# Altium PCB BenchTop_Pcb.PcbDoc
Units mil, origin at the board's own origin, x right, y up, seen from the top; angles counter-clockwise.
Board outline 6000 x 4000 mil, 2 copper layers (Top Layer, Bottom Layer); 37 components, 26 nets, 106 pads, 0 vias.
Unrouted connection lines stored in the file: 69.
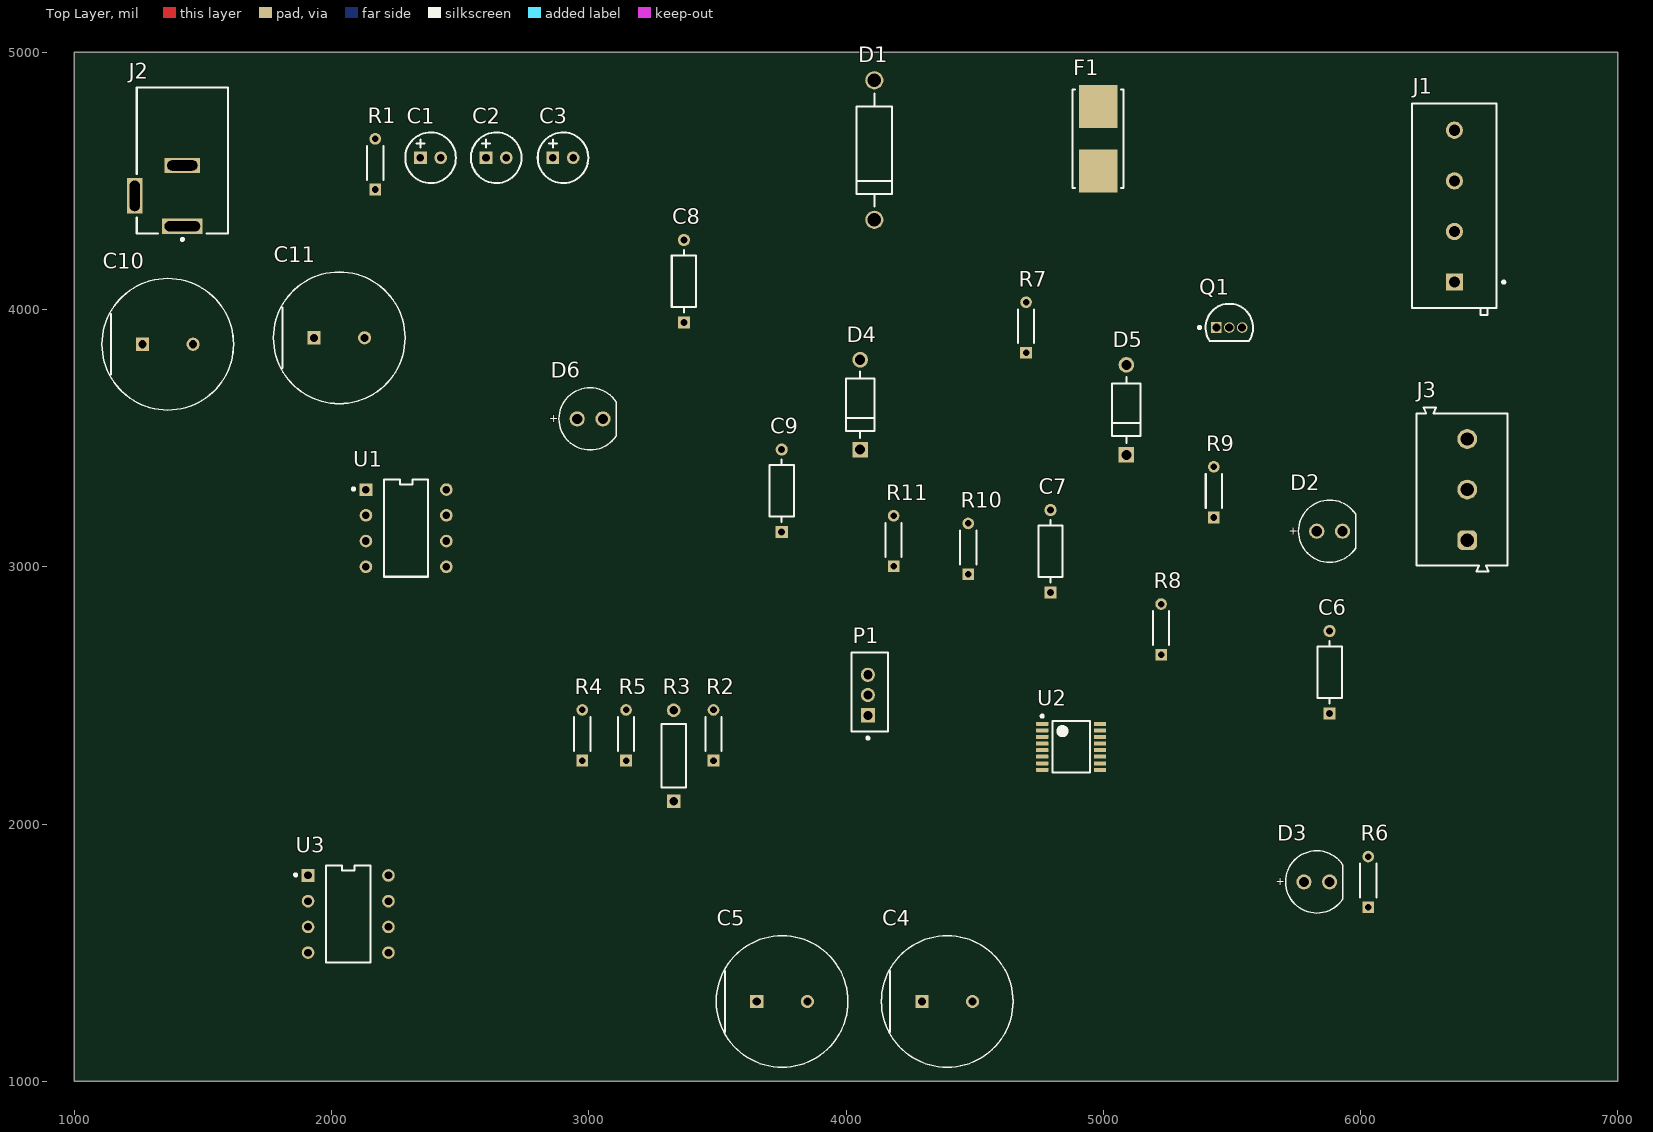
[diagram p0: Top Layer view]
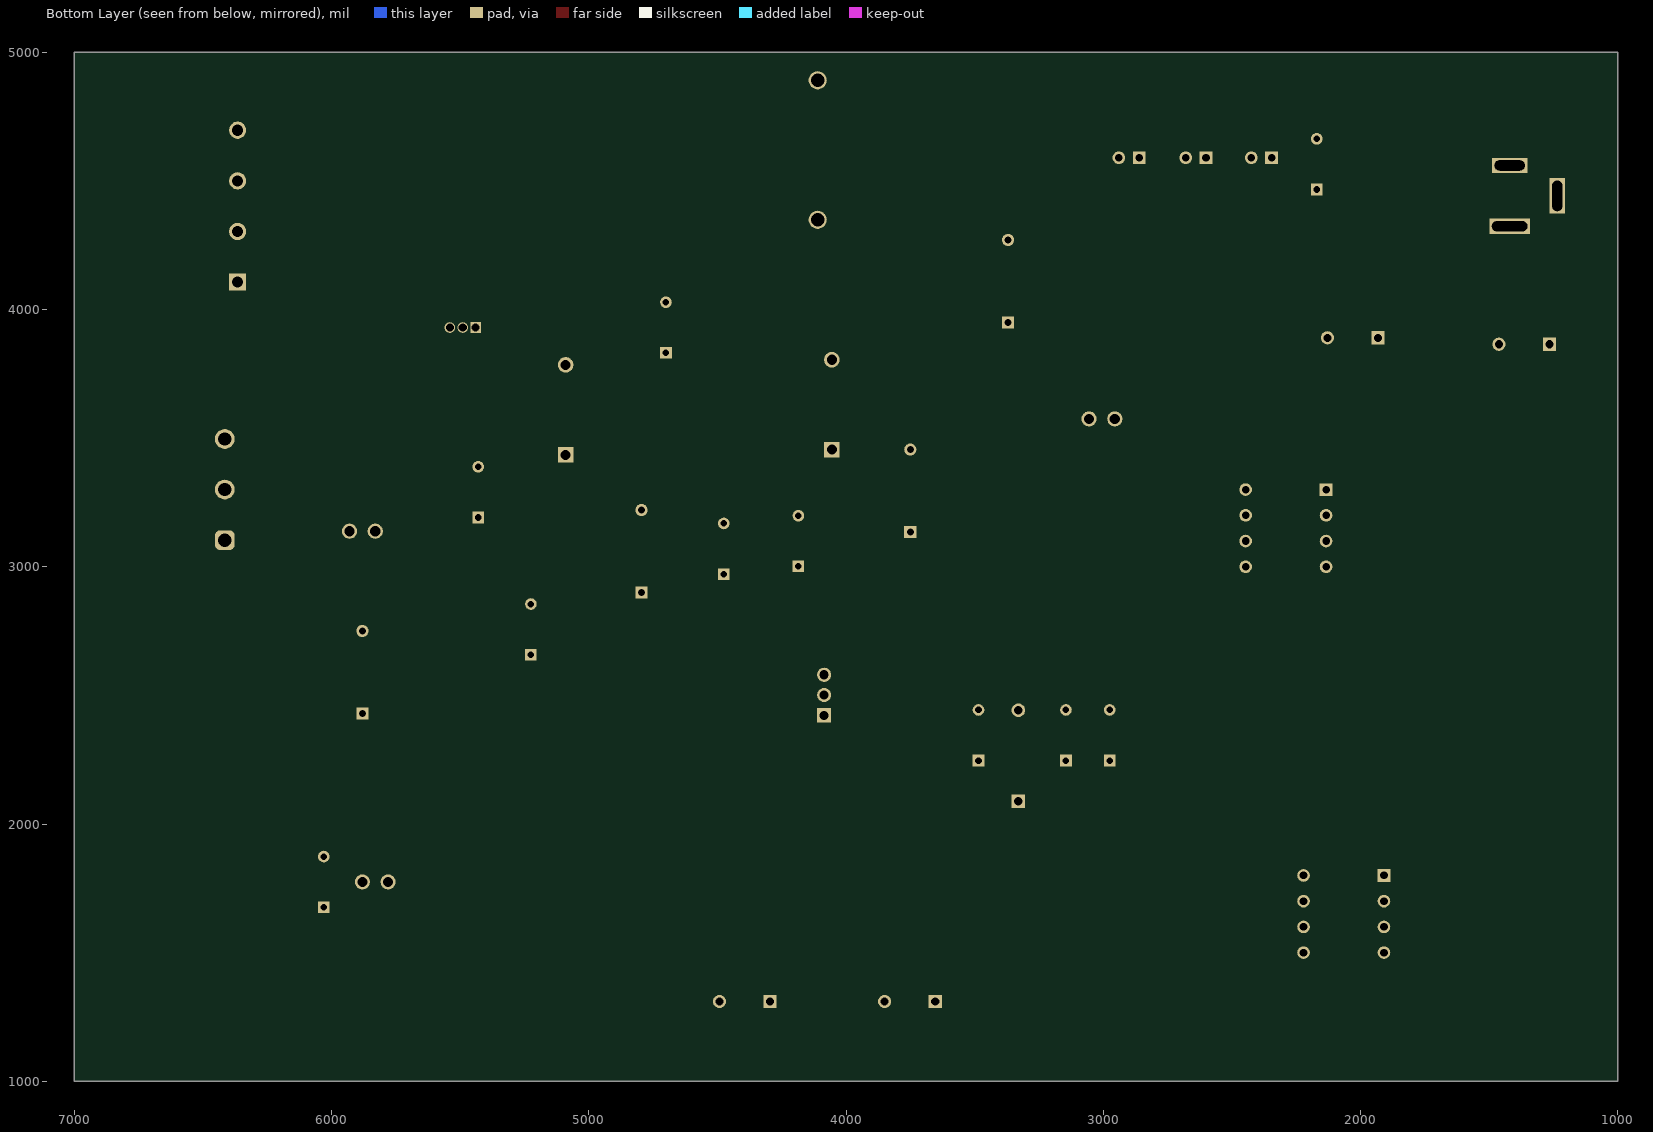
[diagram p1: Bottom Layer view, seen from below]

## Layer stack, top to bottom
Top Solder: solder mask 0.4, Solder Resist, Dk 3.5
Top Layer: signal copper 1.4
Dielectric 1: dielectric 12.6, FR-4, Dk 4.8
Bottom Layer: signal copper 1.4
Bottom Solder: solder mask 0.4, Solder Resist, Dk 3.5

## Board outline
1000,1000 7000,1000 7000,5000 1000,5000

## Design rules (kind name [scope] priority, off if disabled: settings)
Clearance [All] p1: gap=10 ignorepadtopadclearanceinfootprint=FALSE
PolygonConnect [All] p1: connectstyle=Relief reliefconductorwidth=10 reliefentries=4 polygonreliefangle="90 Angle" airgapwidth=10
RoutingVias [All] p1: holewidth=28 width=50 viastyle="Through Hole" minholewidth=28 minwidth=50 maxholewidth=28 maxwidth=50
SolderMaskExpansion [All] p1: expansion=4 istentingtop=FALSE
SupplyNets "Schematic Supply Nets_1" [InNet('GND')] p1: voltage=0.000
SupplyNets "Schematic Supply Nets" [InNet('+12')] p2: voltage=0.000
Width [All] p1: maxlimit=10 minlimit=10 preferedwidth=10
30 further rules are at their usual default settings.

## Components (designator, comment, footprint, x,y, rotation, side; value= is the part's Value field where it differs from the comment)
C1 "47 uF" NIC-UVR-5x11-2_V 2385,4590 r0 top
C2 "47 uF" NIC-UVR-5x11-2_V 2640,4590 r0 top
C3 "47 uF" NIC-UVR-5x11-2_V 2900,4590 r0 top
C4 "10uF" FP-RAD-TH-D_12_5_0_5-L_20-MFG 4393.43,1310 r0 top
C5 "10uF" FP-RAD-TH-D_12_5_0_5-L_20-MFG 3751.57,1310 r0 top
C6 "0.01uF" FP-C410C104M5U5TA7200-MFG 5880,2590 r90 top
C7 "0.22uF" FP-C410C104M5U5TA7200-MFG 4795,3060 r90 top
C8 "0.01uF" FP-C410C104M5U5TA7200-MFG 3370,4110 r90 top
C9 "0.01uF" FP-C410C104M5U5TA7200-MFG 3750,3295 r90 top
C10 "1F" FP-RAD-TH-D_12_5_0_5-L_20-MFG 1363.43,3865 r0 top
C11 "1F" FP-RAD-TH-D_12_5_0_5-L_20-MFG 2030,3890 r0 top
D1 "P6KE36ARLG" ONSC-SURMETIC40-2-017AA-01 4110,4620 r90 top
D2 "151051VS04000" WL-TMRC_D5.9H8.7 5880,3138.27 r0 top value=150nF
D3 "151051RS11000" WL-TMRC_D5.9H8.7 5830,1775 r0 top
D4 "1N4007" FP-1N4007-MFG 4055,3630 r90 top value=15pF
D5 "1N4007" FP-1N4007-MFG 5090,3610 r90 top value=15pF
D6 "151051BS04000" WL-TMRC_D5.9H8.7 3005,3575 r0 top
F1 "0154004.DR" FP-0154-MFG 4980,4664.61 r90 top
J1 "282836-4" FP-282836-4-MFG 6365,4390 r90 top
J2 "PJ-002A" CUI-PJ-002A_V 1420,4441.89 r90 top
J3 "Pot" 691101710003 6395.31,3300.01 r90 top
P1 "292161-3" TECO-292161-3_V 4085,2501.26 r90 top
Q1 "BC547B" ONSC-TO-92-3-29-11 5490,3930 r0 top
R1 "1K" FP-MRS1600-MFG 2170,4565 r90 top
R2 "270ohms" FP-MRS1600-MFG 3485,2345 r90 top
R3 "MFR-25FBF52-1K" RESA60-630X240 3330,2265 r90 top
R4 "12K" FP-MRS1600-MFG 2975,2345 r90 top
R5 "5K" FP-MRS1600-MFG 3145,2345 r90 top
R6 "1K" FP-MRS1600-MFG 6030,1775 r90 top
R7 "1k" FP-MRS1600-MFG 4700,3930 r90 top
R8 "1K" FP-MRS1600-MFG 5225,2756.57 r90 top
R9 "270ohms" FP-MRS1600-MFG 5430,3290 r90 top
R10 "830k" FP-MRS1600-MFG 4475,3070 r90 top
R11 "10K" FP-MRS1600-MFG 4185,3100 r90 top
U1 "LM555CN/NOPB" FP-P0008A-MFG 2290,3150 r0 top
U2 "CD4060BPW" PW0016A_L 4875,2300 r0 top
U3 "LM555CN/NOPB" FP-P0008A-MFG 2065,1650 r0 top

## Footprints (in the part's own frame and the unit in brackets; to place one, negate y for a bottom-side part, rotate by r counter-clockwise, add the part's x,y. Pads: shape width x height; smd on the part's side, far side on the other; paste and mask are expansions set on the pad)
691101710003 [mm] "5,00mm - modular - blue - Horizontal entry with pressure clamp - 12,6mm height - 03p"
  rrect50% 1.95x1.95 hole 1.3: 1(-5,-0.5)
  round 1.95 hole 1.3: 2(0,-0.5) 3(5,-0.5)
  silkscreen extent -8.1,-4.5 8.1,4.5, body extent -8.1,-4.5 8.1,4.5, height 12.65
CUI-PJ-002A_V [mm] "THD, 3-Leads, Body 14.4x9mm, Height 11mm"
  rect 1.5x4 hole 1 slot 3.5 at 90 deg: 1(-3,0)
  rect 1.5x3.5 hole 1 slot 3 at 90 deg: 2(3,0)
  rect 3.5x1.5 hole 1 slot 3 at 0 deg: 3(0,4.7)
  silkscreen extent -4.42,-4.5 10.7,4.5, body extent -3.7,-4.5 10.7,4.9, height 11
FP-1N4007-MFG [mm]
  rect 1.55x1.55 hole 1 paste-2539.97 mask+0: 1(-4.44,0)
  round 1.55 hole 1 paste-2539.97 mask+0: 2(4.44,0)
  silkscreen extent -3.26,-1.4 3.26,1.4, body extent -5.32,-1.5 5.32,1.5, height 0.25
FP-0154-MFG [mm]
  rect 4.24x3.81 smd paste+0 mask+0: 1(-3.185,0) 2(3.185,0)
  silkscreen extent -4.86,-2.51 4.86,2.51, body extent -5.41,-2.62 5.41,2.62, height 0.25
FP-282836-4-MFG [mm]
  rect 1.7x1.7 hole 1.1 paste-2539.97 mask+0: 1(-7.2,0)
  round 1.7 hole 1.1 paste-2539.97 mask+0: 2(-2.2,0) 3(2.8,0) 4(7.8,0)
  silkscreen extent -10.43,-5 10.43,4.18, body extent -10.52,-4.28 10.53,4.28, height 0.25
FP-C410C104M5U5TA7200-MFG [mm]
  rect 1.2x1.2 hole 0.7 paste-2539.97 mask+0: 1(-4.075,0)
  round 1.2 hole 0.7 paste-2539.97 mask+0: 2(4.075,0)
  silkscreen extent -3.08,-1.2 3.08,1.2, body extent -4.77,-1.31 4.77,1.31, height 0.25
FP-MRS1600-MFG [mm]
  rect 1.15x1.15 hole 0.65 paste-2539.97 mask+0: 1(-2.5,0)
  round 1.15 hole 0.65 paste-2539.97 mask+0: 2(2.5,0)
  silkscreen extent -1.55,-0.8 1.8,0.8, body extent -3.17,-0.9 3.17,0.9, height 0.25
FP-P0008A-MFG [mm]
  rect 1.25x1.25 hole 0.75 paste-2539.97 mask+0: 1(-3.97,3.81)
  round 1.25 hole 0.75 paste-2539.97 mask+0: 2(-3.97,1.27) 3(-3.97,-1.27) 4(-3.97,-3.81) 5(3.97,-3.81) 6(3.97,-1.27) 7(3.97,1.27) 8(3.97,3.81)
  silkscreen extent -5.32,-4.79 2.17,4.79, body extent -4.69,-5.18 4.69,5.18, height 0.25
FP-RAD-TH-D_12_5_0_5-L_20-MFG [mm]
  rect 1.3x1.3 hole 0.8 paste-2539.97 mask+0: 1(-2.5,0)
  round 1.3 hole 0.8 paste-2539.97 mask+0: 2(2.5,0)
  silkscreen extent -6.5,-6.5 6.5,6.5, body extent -6.6,-6.6 6.6,6.6, height 0.25
NIC-UVR-5x11-2_V [mm] "THD, 2-Leads, Dia 5mm, Body Length 11mm, Pin Spacing 2mm"
  rect 1.25x1.25 hole 0.75: 1(-1,0)
  round 1.25 hole 0.75: 2(1,0)
  silkscreen extent -2.5,-2.5 2.5,2.5, body extent -2.5,-2.5 2.5,2.5, height 12.5
ONSC-SURMETIC40-2-017AA-01 [mm] "AXIAL, 2-Leads, Diameter 3.49mm"
  round 1.8 hole 1.3: 1(-6.887,0) 2(6.887,0)
  silkscreen extent -5.59,-1.75 5.59,1.75
ONSC-TO-92-3-29-11 [mm] "TO, 3-Leads, Body Dia 4.7mm, Pitch 1.27mm"
  rect 1.05x1.05 hole 0.8: 1(-1.27,0)
  round 1.05 hole 0.8: 2(0,0) 3(1.27,0)
  silkscreen extent -3.07,-1.34 2.35,2.35, body extent -2.35,-1.33 2.36,2.36, height 7.87
PW0016A_L [mm] "SOP, 16-Leads, Body 5.1x4.5mm, Pitch 0.65mm, IPC High Density"
  rrect25% 1.2x0.4 smd: 1(-2.85,2.275) 2(-2.85,1.625) 3(-2.85,0.975) 4(-2.85,0.325) 5(-2.85,-0.325) 6(-2.85,-0.975) 7(-2.85,-1.625) 8(-2.85,-2.275) 9(2.85,-2.275) 10(2.85,-1.625) 11(2.85,-0.975) 12(2.85,-0.325) 13(2.85,0.325) 14(2.85,0.975) 15(2.85,1.625) 16(2.85,2.275)
  silkscreen extent -2.97,-2.55 1.85,3.15, body extent -3.21,-2.5 3.21,2.5, height 1
RESA60-630X240 [mm] "Axial Resistor, 2-Leads, Dia 2.4mm, Body Length 6.3mm"
  rect 1.35x1.35 hole 0.85: 1(-4.5,0)
  round 1.35 hole 0.85: 2(4.5,0)
  silkscreen extent -3.15,-1.2 3.15,1.2, body extent -3.15,-1.2 3.15,1.2, height 2.4
TECO-292161-3_V [mm] "THD, 3-Leads, Body 7.8x3.6mm, Pitch 2 mm"
  rect 1.4x1.4 hole 0.9: 1(-2,0)
  round 1.4 hole 0.9: 2(0,0) 3(2,0)
  silkscreen extent -4.37,-2 4.2,1.6, body extent -3.6,-2 4.2,1.6, height 6.93
WL-TMRC_D5.9H8.7 [mm] "THT Mono-color Round Color LED, 2-leads"
  round 1.5 hole 1: 1(-1.27,0) 2(1.27,0)
  silkscreen extent -3.07,-3.07 2.58,3.08, body extent -2.95,-2.95 2.45,2.95, height 9.2

## Part data
C1 C2 C3: library part CMP-1217-00002-1, "Aluminum Electrolytic Capacitor, 47 uF +/-20%, 35 V, -40 to 85 degC, 2-Pin THD, RoHS, Bulk", Capacitance Tolerance=+/-20%, Manufacturer=Nichicon, PartNumber=UVR1V470MDD, Rated Voltage="35 V", Temperature Range="-40 to 85 degC", ComponentLink1Description="Manufacturer URL", ComponentLink1URL=http://www.nichicon.co.jp/, ComponentLink2Description=Datasheet, ComponentLink2URL=http://nichicon-us.com/english/products/pdfs/e-vr.pdf, ComponentLink3Description="Package Specification", ComponentLink3URL=http://nichicon-us.com/english/products/pdfs/e-vr.pdf, DatasheetVersion=Sep-13, Mounting Technology="Through Hole", PackageDescription="2-Pin Through Hole Device, Dia 5 mm, Body Length 11 mm, Pin Spacing 2 mm", Packing=Bulk, Rated Capacitance="47 uF", Rated Ripple="130 mA", RoHS=TRUE
C4 C5: library part CMP-05427-000677-1, "Aluminum Electrolytic Capacitors (Radial Lead Type) 20uF ±20% 450V", Case/Package=Radial, Max Operating Temperature=85°C, Min Operating Temperature=-25°C, Package Quantity=500, Ripple Current=130mA, Tolerance=20%, Voltage Rating=450V, Capacitance=10uF, Diameter=12.5mm, Height=20mm, Height - Seated (Max)=0.866inch, Lead Diameter=0.6mm, Lead Pitch=5mm, Lead/Base Style=Straight, Length=20mm, Life (Hours)=2000Hour, Mount="Through Hole", Packaging="Ammo Pack", Radiation Hardening=No, RoHS Compliant=Yes, Series=M, Termination=Radial, Voltage Rating (DC)=450V
C6 C7 C8 C9: library part CMP-03020-034640-1, "CAP CER 0.1UF 50V Z5U AXIAL", Capacitance=100nF, Case/Package=Axial, Dielectric=Z5U, Max Operating Temperature=85°C, Min Operating Temperature=10°C, Package Quantity=5000, Tolerance=20%, Voltage Rating=50V, Construction=AXIAL, Dissipation Factor=4%, Lead Diameter=0.51mm, Lead Free="Lead Free", Lead Length=25.4mm, Length=4.32mm, Mount="Through Hole", Number of Pins=2, Packaging="Tape and Reel", Radiation Hardening=No, REACH SVHC="No SVHC", RoHS Compliant=Yes, Series="Aximax 400", Termination=Axial, Voltage Rating (DC)=50V
C10 C11: library part CMP-05427-000677-1, "Aluminum Electrolytic Capacitors (Radial Lead Type) 10uF ±20% 450V", Capacitance=10uF, Case/Package=Radial, Max Operating Temperature=85°C, Min Operating Temperature=-25°C, Package Quantity=500, Ripple Current=130mA, Tolerance=20%, Voltage Rating=450V, Diameter=12.5mm, Height=20mm, Height - Seated (Max)=0.866inch, Lead Diameter=0.6mm, Lead Pitch=5mm, Lead/Base Style=Straight, Length=20mm, Life (Hours)=2000Hour, Mount="Through Hole", Packaging="Ammo Pack", Radiation Hardening=No, RoHS Compliant=Yes, Series=M, Termination=Radial, Voltage Rating (DC)=450V
D1: library part CMP-1061-00690-1, "600 W Peak Power Transient Voltage Suppressor, 2-Pin Surmetic(TM) 40, Pb-Free, Tape and Reel", Manufacturer="On Semiconductor", ComponentLink1Description="Manufacturer URL", ComponentLink1URL=http://www.onsemi.com/, ComponentLink2Description=Datasheet, ComponentLink2URL=http://www.onsemi.com/pub_link/Collateral/P6KE6.8A-D.PDF, ComponentLink3Description="Package Specification", ComponentLink3URL=http://www.onsemi.cn/pub_link/Collateral/017AA.PDF, DatasheetVersion="Rev. 10", Direction=Unidirectional, IR Max (uA)=5, Mounting Technology="Through Hole", PackageDescription="2-Pin, Axial Lead, Diameter 3.49 mm", PackageReference=SURMETIC40-2-017AA-01, PackageVersion="Rev. O, 09/2005", Packing="Tape and Reel", PartNumber=P6KE36ARLG, PPK Max (W)=600, RoHS=Pb-Free, V(BR) Typ (V)=36
D2: library part CMP-1488-00007-2, Case/Package=Radial, Color=Green, Forward Current=100mA, Forward Voltage=2.1V, Manufacturer=Nichicon, Manufacturer Part Number=UKL1HR15KDDANA, Max Operating Temperature=85°C, Max Reverse Voltage (DC)=5V, Min Operating Temperature=-40°C, Package Quantity=200, Ripple Current=1.6mA, Supplier Part Number 1=493-15391-ND, Test Current=20mA, Tolerance=10%, Voltage Rating=50V, Category="Aluminum Electrolytic Capacitors", ComponentLink1Description=https://datasheet.ciiva.com/11688/e-kl-11688681.pdf?src-supplier=Avnet, ComponentLink1URL=https://datasheet.ciiva.com/11688/e-kl-11688681.pdf?src-supplier=Avnet, ComponentLink2Description=https://datasheet.ciiva.com/109/e-kl-109678.pdf?src-supplier=Digikey, ComponentLink2URL=https://datasheet.ciiva.com/109/e-kl-109678.pdf?src-supplier=Digikey, Diameter=5mm, Dominant Wavelength=572nm, Height=8.6mm, Height - Seated (Max)=0.472inch, Lead Pitch=0.079inch, Length=5mm, Lens Size=5mm, Lens Style="Circular, Diffused, Round", Life (Hours)=2000Hour, Luminous Intensity=140mcd, Mount="Through Hole", Mounting Technology="Through Hole", NexarPartId=29717814, Packaging=Bulk, Peak Wavelength=573nm, Pricing 1="1=0.29, 10=0.188, 50=0.1386, 100=0.1129, 500=0.08914, 2000=0.07131, 4000=0.06975 (USD)", Radiation Hardening=No, REACH SVHC=Unknown, RoHS=Compliant, RoHS Compliant=Yes, Series=UKL, Stock 1=3618, Supplier 1=Digikey, Termination=Radial, Viewing Angle=40°, Wavelength=572nm, Width=5mm
D3: library part CMP-1488-00008-2, Case/Package=Radial, Color=Red, Forward Current=100mA, Forward Voltage=2.1V, Max Operating Temperature=85°C, Max Reverse Voltage (DC)=5V, Min Operating Temperature=-40°C, Test Current=20mA, Dominant Wavelength=645nm, Height=8.6mm, Length=5mm, Lens Size=5mm, Lens Style="Circular, Diffused, Round", Luminous Intensity=30mcd, Mount="Through Hole", NexarPartId=29717813, Packaging=Bulk, Peak Wavelength=650nm, REACH SVHC=Unknown, RoHS=Compliant, Viewing Angle=60°, Wavelength=630nm, Width=5mm
D4 D5: library part CMP-123542-000001-1, "Rectifier diode 1000 V 1 A DO-41, ,", Capacitance=15pF, Forward Current=1A, Manufacturer=Diotec, Max Junction Temp=+175°C, Max Repetitive Reverse Voltage=1000V, Max Surge Forward Current=27A, Peak Reverse Current=5uA, Temperature="-50°C to +175°C", Temperature Range Low=-50°C, Automotive=No, Category=Diode, ComponentLink2Description=Datasheet, ComponentLink2URL=https://datasheet.octopart.com/1N4007-Diotec-datasheet-62346875.pdf, Device Class L1="Discrete Semiconductors", Device Class L2=Diodes, Device Class L3="Rectifier Diodes", Height=2.8mm, Ipc Land Pattern Name=DIOAD888W100L520D280, Lead Free=Yes, Manufacturer Part Number=1N4007, Octopart=https://octopart.com/1n4007-diotec-4040411, Package=1N4007, Reverse Voltage=1000V, RoHS=TRUE, Temperature Range High=+175°C
D6: library part CMP-1488-00009-2, Case/Package=Radial, Color=Blue, Forward Current=100mA, Forward Voltage=3.2V, Max Operating Temperature=85°C, Max Reverse Voltage (DC)=5V, Min Operating Temperature=-40°C, Test Current=20mA, Dominant Wavelength=470nm, Height=8.6mm, Length=5mm, Lens Size=5mm, Lens Style="Circular, Diffused, Round", Luminous Intensity=500mcd, Mount="Through Hole", NexarPartId=29717812, Packaging=Bulk, Peak Wavelength=465nm, REACH SVHC=Unknown, RoHS=Compliant, Viewing Angle=40°, Wavelength=470nm, Width=5mm
F1: library part CMP-08605-000003-1, "FUSE BRD MNT 4A 125VAC/VDC 2SMD", Fuse Current=4A, Manufacturer=Littelfuse, Max Fuse Ac Voltage=125V, Package=0154, Temperature="-55°C to +125°C", Temperature Range High=+125°C, Temperature Range Low=-55°C, Automotive=No, Category=Fuse, ComponentLink2Description=Datasheet, ComponentLink2URL=https://www.littelfuse.com/~/media/electronics/datasheets/fuses/littelfuse_fuse_154_154t_154l_154tl_datasheet.pdf.pdf, Device Class L1="Circuit Protection", Device Class L2=Fuses, Device Class L3=unset, Digikey Description="FUSE BRD MNT 4A 125VAC/VDC 2SMD", Fuse Blow Speed=Fast, Height=3.81mm, Lead Free=Yes, Manufacturer Part Number=0154004.DR, Max Fuse Dc Voltage=125V, Mouser Description="Surface Mount Fuses Fuseblock w/ fuse 4A OMNI BLOK 154", Octopart=https://octopart.com/0154004.dr-littelfuse-565861, RoHS=TRUE
J1: library part CMP-03790-46505329-1, "282836-4 Connector, Terminal Block; Wire Receptacle; 4 Pos.; 16-30 AWG; 0.197 in. CL; Sid", Color=Green, Current=13.5A, Flammability Rating="UL94 V-0", Manufacturer Lifecycle Status=ACTIVE, Max Supply Voltage (AC)=300V, Voltage Rating (AC)=250V, Approvals=UL, Connector System=Wire-to-Board, Connector Type=Receptacle, Contact Material=Brass, Contact Plating=Tin, Current Rating=13.5A, Depth=8.2mm, ELV=Compliant, Housing Color=Green, Housing Material=Polyamide, Lead Free="Lead Free", Lead Pitch=5mm, Length=20mm, Lifecycle Status=Production, Max Current Rating=13.5A, Max Voltage Rating (AC)=300V, Mount="Through Hole", NexarPartId=46505329, Number of Circuits=4, Number of Contacts=4, Number of Levels=1, Number of Poles=4, Number of Positions=4, Number of Positions Per Level=4, Number of Rows=1, Operating Supply Voltage=300V, Orientation=Straight, Packaging=Bulk, Pitch=5mm, Plating=Brass, Radiation Hardening=No, REACH SVHC=Unknown, RoHS=Compliant, Tail Length=3.5mm, Termination="Screw, Solder", Thread Size=M3, Voltage=300V, Voltage Rating=300V, Voltage Rating (DC)=250V, Width=10mm, Wire Gauge (Max)=30AWG, Wire Gauge (Min)=30AWG
J2: library part CMP-2000-06895-2, "Through Hole Right Angle DC Power Jack, 2.5 A, 2 mm Center Pin, 3 Position, -25 to 85 degC, RoHS, Bulk", Current Rating=2.5A, Flammability Rating=UL94V-0, Insulation Resistance=50MOhms, Manufacturer=CUIInc., Operating Temperature Range=-25Cto+85C, Package Description="3-Pin Through Hole Device, Body 14.4 x 9 mm, Height 11 mm", Voltage Rating=24V, Brand=CUI, Connector Type=DCPowerJack, Contact Gender=Male, Contact Material=Copper, Contact Plating=Nickel, Datasheet URL=http://www.cui.com/product/resource/pj-002a.pdf, Datasheet Version="Rev. 1.03, 04/2016", Factory Pack Quantity=500, Housing Material=PolybutyleneTerephthalate(PBT), Inside Contact Diameter=2mm, Manufacturer URL=http://www.cui.com/, Mounting Angle=Right, Mounting Style=ThroughHole, Mounting Technology=ThroughHole, Outside Contact Diameter=6.5mm, Package Reference=PJ-002A, Product=Jacks, Product Category=DCPowerConnectors, RoHS=True, Termination Style=ThroughHole
J3: library part CMP-1502-03257-2, Color=Blue, Current=16A, Max Operating Temperature=105°C, Min Operating Temperature=-40°C, Voltage=250V, Contact Material=Brass, Contact Plating=Tin, Current Rating=16A, Height=16.4mm, Housing Material=Nylon, Lead Pitch=5mm, Length=9mm, Mount="Through Hole", NexarPartId=8917705, Number of Contacts=3, Number of Levels=1, Number of Pins=3, Number of Positions Per Level=3, Packaging=Box, Pitch=5.0038mm, Plating=Steel, REACH SVHC=Unknown, RoHS=Compliant, Stripping Length=-7mm, Termination=Screw, Voltage Rating=250V, Width=16.2mm, Wire Gauge (Max)=26AWG, Wire Gauge (Min)=14AWG, Wire/Cable Gauge=26AWG
P1: library part CMP-2000-05551-1, "Male Header, Pitch 2 mm, 1 x 3 Position, Height 6.8 mm, Tail Length 3.2 mm, -40 to 105 degC, RoHS, Bulk", Manufacturer="TE Connectivity", Package Description="Male Header, Pitch 2 mm, 1 x 3 Position, Height 6.8 mm, Tail Length 3.2 mm", Contact Material=Brass, Contact Plating=TinPlatedContacts, Contact Termination Type=ThroughHole, Datasheet URL=http://www.te.com/commerce/DocumentDelivery/DDEController?Action=showdoc&DocId=Customer+Drawing%7F292161%7FP1%7Fpdf%7FEnglish%7FENG_CD_292161_P1.pdf%7F292161-3, Datasheet Version="Rev. P1, 06/2016", Gender=Header, Manufacturer URL=http://www.te.com/, Mounting Technology=ThroughHole, No. of Contacts=3Contacts, No. of Rows=1Rows, Package Reference=292161-3, Pitch Spacing=2mm, Product Range=AMPCTSeries, SVHC=NoSVHC(15-Jun-2015)
Q1: library part CMP-1048-01467-1, "Amplifier Transistor, NPN Silicon, 3-Pin TO-92, Bulk Box", Manufacturer="On Semiconductor", ComponentLink1Description="Manufacturer URL", ComponentLink1URL=http://www.onsemi.com/, ComponentLink2Description=Datasheet, ComponentLink2URL=http://www.onsemi.com/pub_link/Collateral/BC546-D.PDF, ComponentLink3Description="Package Specification", ComponentLink3URL=http://www.onsemi.cn/pub_link/Collateral/2N6426-D.PDF, DatasheetVersion="Rev. 7", fT Min (MHz)=150, IC Continuous (A)=0.1, Mounting Technology="Through Hole", PackageDescription="3-Pin Transistor Outline, Body 4.825 x 3.685 mm, Pitch 1.27 mm", PackageReference=TO-92-3-29-11_AM_SL, PackageVersion="Rev. AM", Packing="Bulk Box", PartNumber=BC547B, Polarity=NPN, RoHS=FALSE
R1 R2 R4 R5 R6 R7 R8 R9 R10 R11: library part CMP-02408-000019-1, "RES 20K OHM 0.4W 1% AXIAL", Case/Package=Conformal, Max Operating Temperature=155°C, Max Power Dissipation=400mW, Min Operating Temperature=-55°C, Resistance=20kR, Resistor Type="Metal Film", Temperature Coefficient=50ppm/°C, Tolerance=1%, Construction=Cylindrical, Contact Plating=Tin, Diameter=1.6mm, Length=3.6mm, Military Standard=Not, Mount="Through Hole", Number of Terminations=2, Packaging="Tape and Reel", Power Rating=400mW, Radiation Hardening=No, RoHS Compliant=Yes, Series=MRS16, Technology="THIN FILM", Termination=Axial
R3: library part CMP-1659-00075-1, "Axial Resistor, 1 KOhm, +/- 1%, 0.25W, -55 to 155 degC, 2-Pin THD, RoHS, Bulk", Case\Package=Axial, Max Operating Temperature="155 degC", Min Operating Temperature="-55 degC", Package Quantity=200, Power Rating="250 mW", Resistance="10 kohm", Tolerance=1%, Voltage Rating="250 V", ComponentLink1Description="Manufacturer URL", ComponentLink1URL=http://www.yageo.com/, ComponentLink2Description=Datasheet, ComponentLink2URL=http://www.yageo.com/documents/recent/Yageo%20LR_MFR_2013.pdf, DatasheetVersion=Apr-13, Length="0.248 inch", PackageDescription="2-Pin Axial Lead, Dia 2.4 mm, Body Length 6.3 mm", PackageReference=MFR-25, Packaging=Bulk, RoHSCompliant=true
U1 U3: library part CMP-0056-00016-4, "IC OSC SINGLE TIMER 100KHZ 8-DIP", Ambient Temperature Range High=+70°C, Ambient Temperature Range Low=0°C, Manufacturer="Texas Instruments", Max Supply Voltage=16V, Min Supply Voltage=4.5V, Nominal Supply Current=3mA, Package=P0008A, Temperature="0°C to +70°C", Automotive=No, Category=IC, ComponentLink2Description=Datasheet, ComponentLink2URL=http://www.ti.com/lit/ds/symlink/lm555.pdf, Device Class L1="Integrated Circuits (ICs)", Device Class L2="Clock and Timing", Device Class L3="Timers and Oscillators", Digikey Description="IC OSC SINGLE TIMER 100KHZ 8-DIP", Height=5.08mm, Lead Free=Yes, Manufacturer Part Number=LM555CN/NOPB, Max Junction Temp=+70°C, Number Of Timers/Counters=1, Octopart=https://octopart.com/lm555cn%2Fnopb-texas+instruments-24814897, RoHS=TRUE, Standoff Height=0.51mm, Temperature Range High=+70°C, Temperature Range Low=0°C
U2: library part CMP-1086-00016-4, "CMOS 14-Stage Ripple Carry Binary Counter / Divider and Oscillator, 3 to 18 V, -55 to 125 degC, 16-Pin TSSOP (PW), Green (RoHS & no Sb/Br), Tube", Manufacturer="Texas Instruments", Temperature Range="-55 to 125 degC", ComponentLink1Description="Manufacturer URL", ComponentLink1URL=http://www.ti.com, ComponentLink2Description=Datasheet, ComponentLink2URL=http://www.ti.com/lit/ds/symlink/cd4060b.pdf, ComponentLink3Description="Package Specification", ComponentLink3URL=http://www.ti.com/lit/ml/mpds361/mpds361.pdf, DatasheetVersion=SCHS049C, Mounting Technology="Surface Mount", Note1="Green (RoHS & no Sb/Br)", PackageDescription="16-Pin Plastic Small-Outline Package, Body 5 x 4.4 mm, Pitch 0.65 mm", PackageReference=PW0016A, PackageVersion=4040064-4/G, Packing=Tube, PartNumber=CD4060BPW, tPHL, tPLH (typ) @ 5 V="370 ns", VDD="3 to 18 V"

## Nets (pads, with @x,y where several pads share a name; then routed paths per layer and width w, separated by ;. In a path a pad name is that pad's centre, name@x,y a point inside that pad or via, vN(x,y) a via of type N, cw(c..) or ccw(c..) an arc to the next point about the centre after c; other vN are vias at no path point)
+12: C8.1 F1.2 J1.2 R1.1 R3.1 R5.1 R8.1 U1.4 U1.8 U2.16 U3.4 U3.8
Control_Input: P1.2 R9.1
GND: C1.2 C2.2 C3.2 C4.1 C5.1 C6.1 C8.2 C9.2 C10.1 C11.1 D2.2 D3.2 D6.2 J2.2 J2.3 Q1.3 R6.1 U1.1 U2.8 U3.1
Master_Reset: U2.12 U3.3
Motor_Control: P1.3 U2.2
Motor_Pin: Q1.1
Motor_Signal: J1.3 R2.1 U1.3
NetC1_1: C1.1 C2.1 C3.1 D1.1 D1.2 F1.1 J2.1
NetC6_2: C6.2 U1.5
NetC7_1: C7.1 R7.1 R10.1
NetC7_2: C7.2 U2.9
NetC9_1: C9.1 U3.5
NetC10_2: C10.2 C11.2 R11.1
NetD2_1: D2.1 R2.2
NetD3_1: D3.1 R3.2
NetD4_1: D4.1 R4.1
NetD4_2: D4.2 J3.3
NetD5_1: D5.1 J3.1
NetD5_2: D5.2 R1.2 R4.2 U1.7
NetD6_1: D6.1 Q1.2 R9.2
NetP1_1: P1.1 R5.2 R6.2
NetR7_2: R7.2 U2.11
NetR8_2: R8.2 R11.2 U3.7
NetR10_2: R10.2 U2.10
NetU3_2: U3.2 U3.6
POT_SIGNAL: C4.2 C5.2 J3.2 U1.2 U1.6
pads on no net: J1.1 J1.4 U2.1 U2.3 U2.4 U2.5 U2.6 U2.7 U2.13 U2.14 U2.15

## Text inside footprints (layer, text, board x,y; h text height)
D2: Top Overlay "+" at 5720.55,3125.28 h31.5
D3: Top Overlay "+" at 5670.55,1762.01 h31.5
D6: Top Overlay "+" at 2845.55,3562.01 h31.5